# Altium PCB STM32FOC_AD_PCB.pcbdoc
Units mil, origin at the board's own origin, x right, y up, seen from the top; angles counter-clockwise.
Board outline 2805 x 2720 mil, 2 copper layers (Top Layer, Bottom Layer); 42 components, 35 nets, 188 pads, 52 vias.
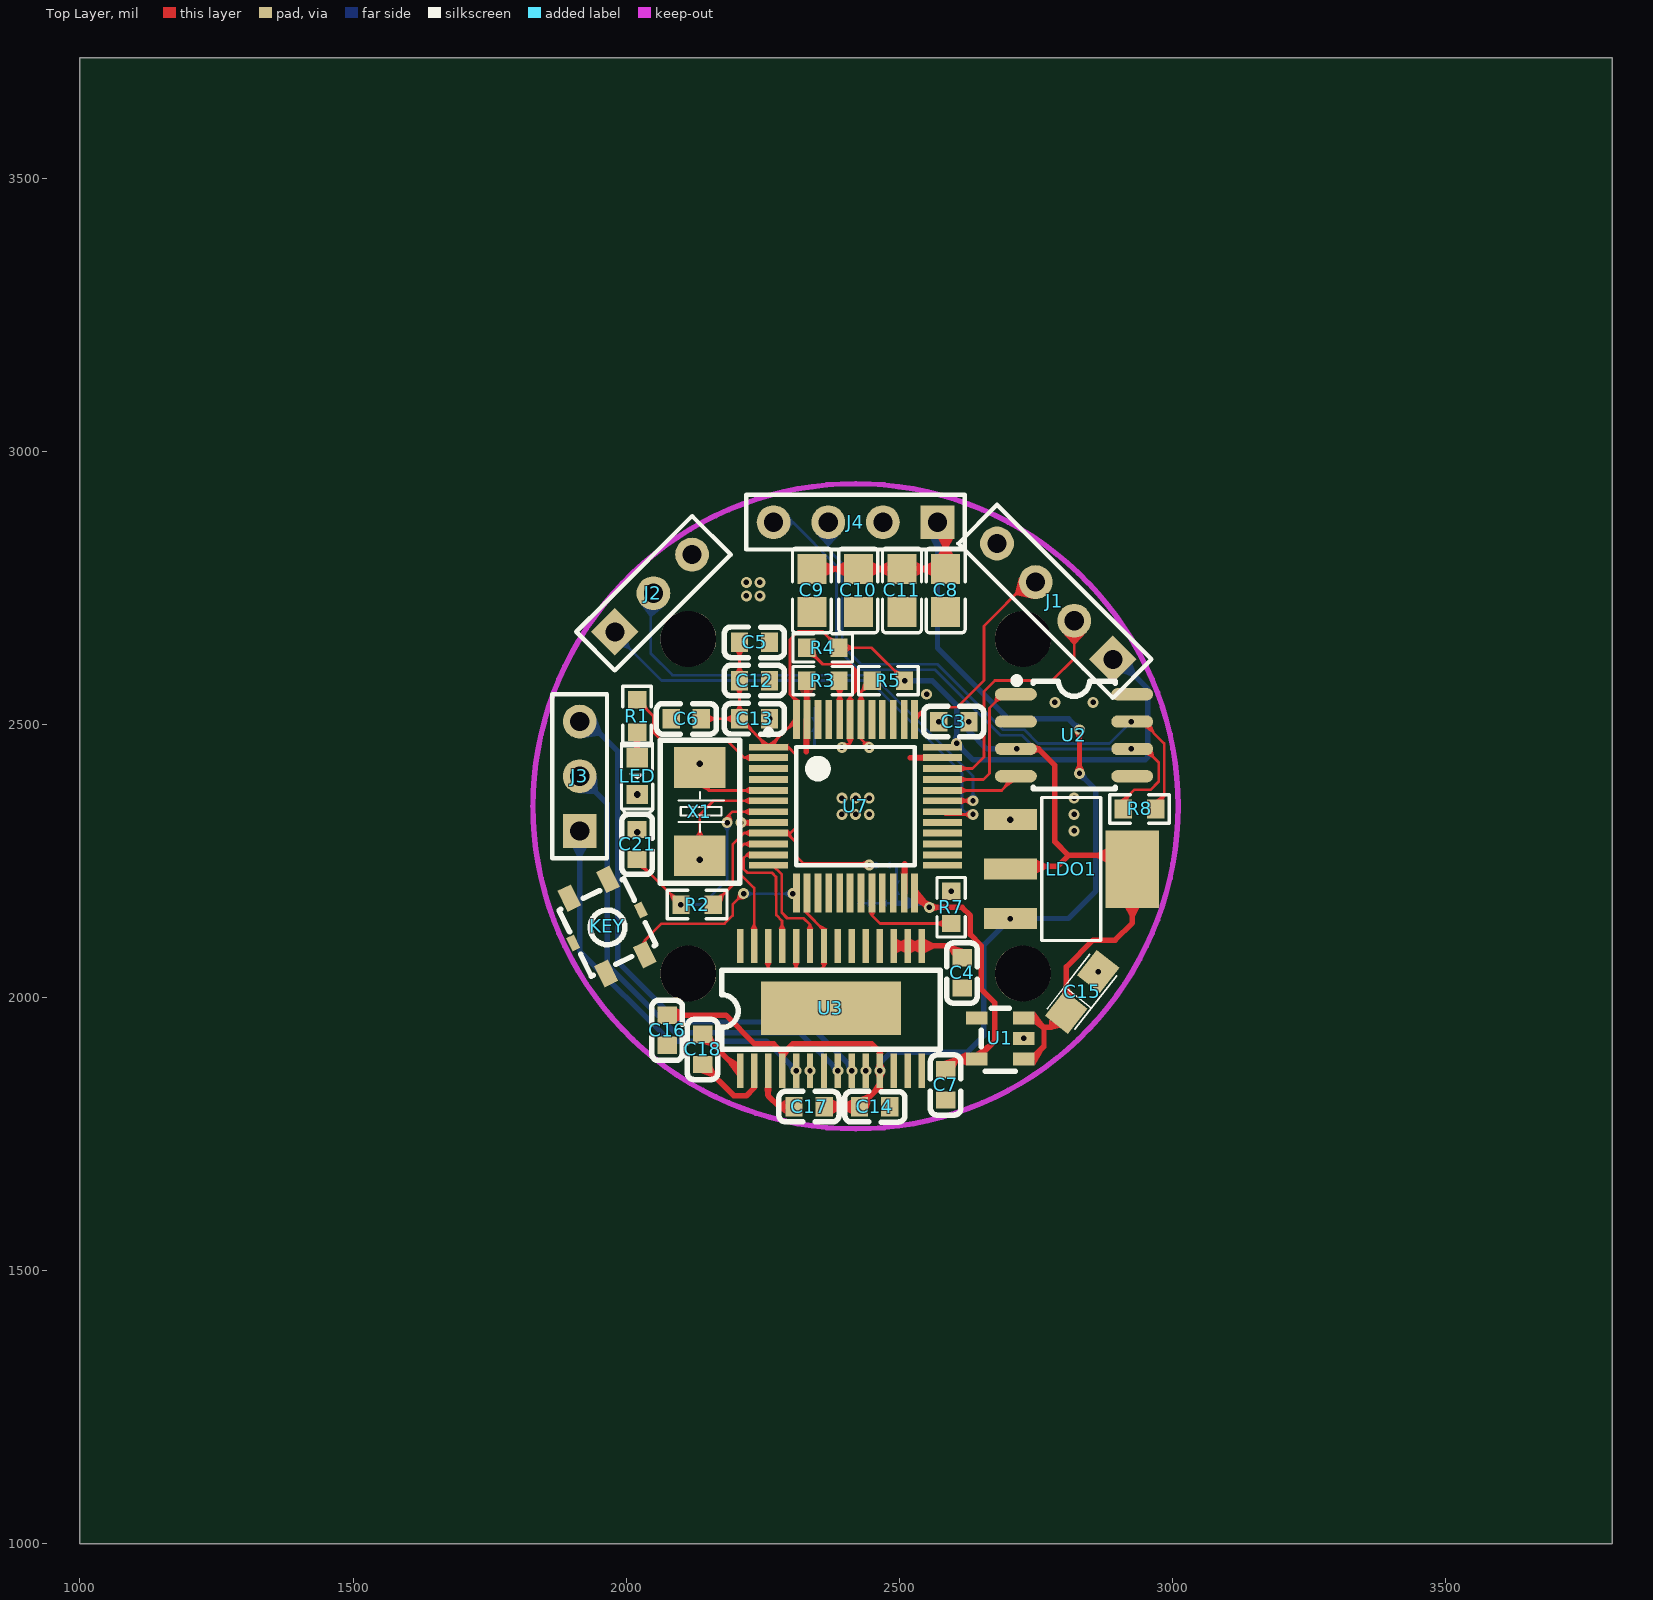
[diagram p0: Top Layer view]
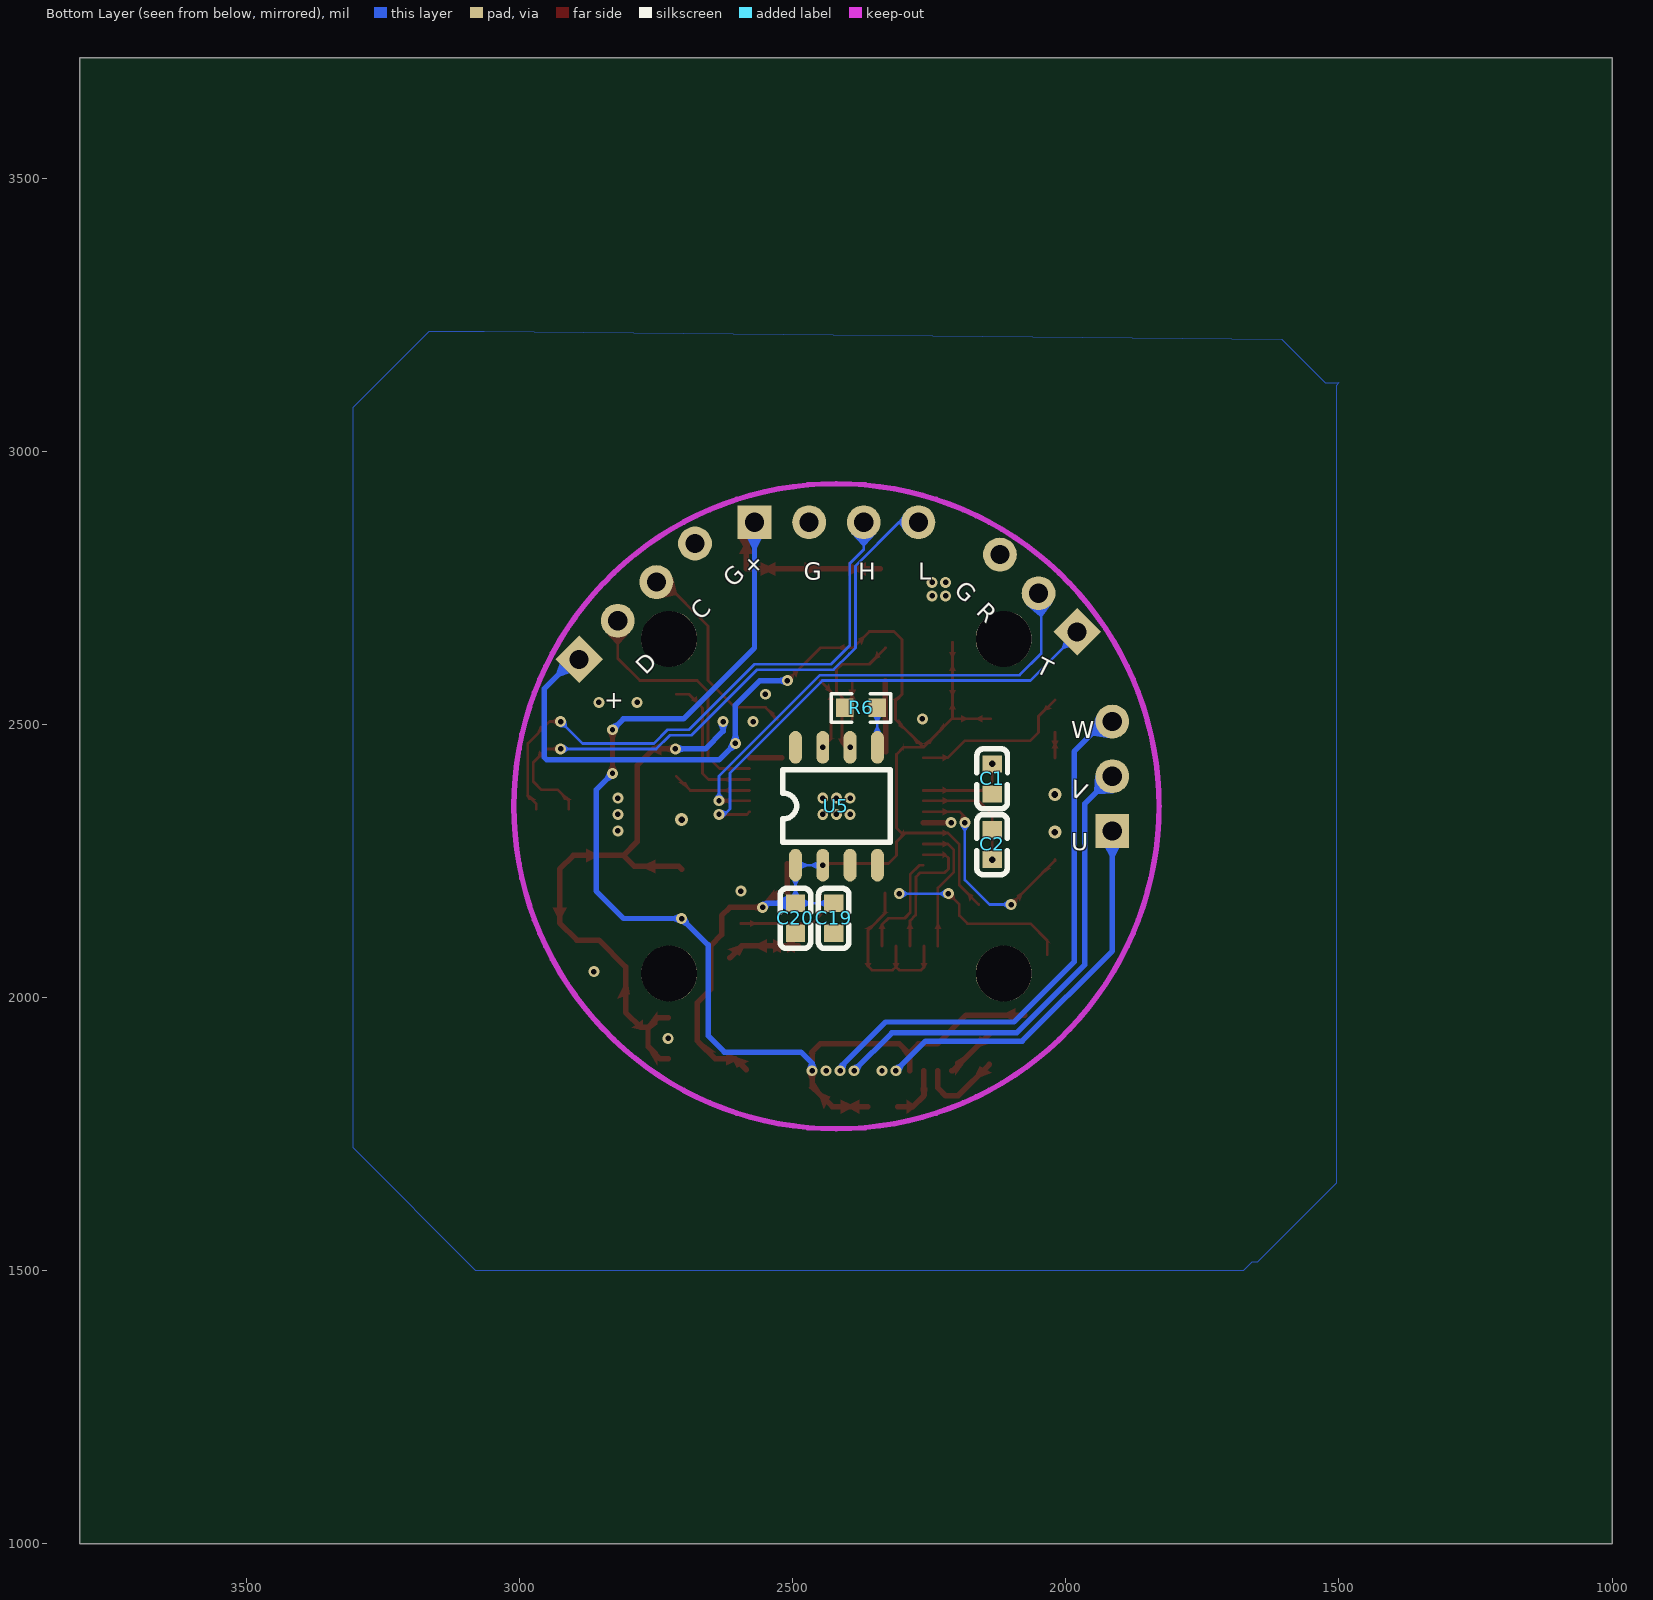
[diagram p1: Bottom Layer view, seen from below]

## Layer stack, top to bottom
Top Layer: signal copper (thickness not stored)
Dielectric: dielectric 12.6, FR-4, Dk 4.8
Bottom Layer: signal copper (thickness not stored)

## Board outline
3805,1000 1000,1000 1000,3720 3805,3720

## Components (designator, comment, footprint, x,y, rotation, side; value= is the part's Value field where it differs from the comment)
C1 "20pF" C0603#1 2135,2400 r90 bottom
C2 "20pF" C0603#1 2135,2280 r270 bottom
C3 "0.1uF" C0603#2 2600,2505 r0 top
C4 "0.47uF" C0603#2 2615,2045 r90 top
C5 "0.1uF" C0603#2 2235,2650 r0 top
C6 "0.1uF" C0603#2 2110,2510 r180 top
C7 "1uF" C0603#2 2585,1840 r90 top
C8 "22uF" C0805 2585,2745 r90 top
C9 "22uF" C0805 2340,2745 r90 top
C10 "22uF" C0805 2425,2745 r90 top
C11 "22uF" C0805 2505,2745 r90 top
C12 "0.1uF" C0603#2 2235,2580 r0 top
C13 "0.1uF" C0603#2 2235,2510 r0 top
C14 "0.1uF" C0603#2 2455,1800 r180 top
C15 "10uF" CASE-A_3216 2835,2010 r52 top
C16 "0.1uF" C0603#2 2075,1940 r90 top
C17 "0.1uF" C0603#2 2335,1800 r0 top
C18 "0.01uF" C0603#2 2140,1905 r90 top
C19 "0.1uF" C0603#1 2425,2145 r270 bottom
C20 "1uF" C0603#1 2495,2145 r270 bottom
C21 "0.1uF" C0603#2 2020,2280 r270 top
J1 "2.54-4P" HDR-M-2.54_1X4 2785,2725 r135 top
J2 "2.54-3P" HDR-M-2.54_1X3 2050,2740 r45 top
J3 "2.54-3P" HDR-M-2.54_1X3 1915,2405 r90 top
J4 "2.54-4P" HDR-M-2.54_1X4 2420,2870 r180 top
KEY "YTSA007A0152501B" SW-SMD_4P-L3.4-W3.4-P2.00-LS4.0_TS3315A160GF 1965,2130 r296 top
LDO1 "SPX1117-5V" SOT-223-4_L6.5-W3.5-P2.30-LS7.0-BR 2815,2235 r180 top
LED "LED-0603_R" LED0603_RED 2020,2405 r270 top
R1 "1k" R0603#1 2020,2515 r90 top
R2 "10k" R0603#1 2130,2170 r180 top
R3 "10k" R0603#1 2360,2580 r180 top
R4 "10k" R0603#1 2360,2640 r0 top
R5 "10k" R0603#1 2480,2580 r0 top
R6 "1k" R0603#2 2375,2530 r180 bottom
R7 "10k" R0603#1 2595,2165 r270 top
R8 "120R" R0603#1 2940,2345 r0 top
U1 "SPX3819-3.3" SOT-23-5_L2.9-W1.6-P0.95-LS2.8-BL 2685,1925 r90 top
U2 "TJA1050T" SOIC-8_L5.0-W4.0-P1.27-LS6.0-BL#1 2820,2480 r270 top
U3 "DRV8313PWPR" HTSSOP-28_L9.8-W4.5-P0.65-LS6.6-BL-EP 2375,1980 r0 top
U5 "AS5600-ASOM" SOIC-8_L5.0-W4.0-P1.27-LS6.0-BL#2 2420,2350 r0 bottom
U7 "STM32F103C8T6" STM-LQFP48 2420,2350 r0 top
X1 "8MHz" CRYSTAL-SMD_L5.0-W3.2 2135,2340 r90 top

## Footprints (in the part's own frame and the unit in brackets; to place one, negate y for a bottom-side part, rotate by r counter-clockwise, add the part's x,y. Pads: shape width x height; smd on the part's side, far side on the other; paste and mask are expansions set on the pad)
C0603#1 [mm]
  rect 0.8x0.9 smd paste+0 mask+0.051: 1(0.7,0) 2(-0.7,0)
  silkscreen extent -1.39,-0.72 1.41,0.71
C0603#2 [mm]
  rect 0.8x0.9 smd paste+0 mask+0.051: 1(-0.7,0) 2(0.7,0)
  silkscreen extent -1.41,-0.71 1.39,0.72
C0805 [mm]
  rect 1.41x1.35 smd paste-100 mask+0.051: 1(-1,0) 2(1,0)
  silkscreen extent -1.96,-0.9 1.96,0.9
CASE-A_3216 [mm]
  rect 1.5x1.359 smd paste+0 mask+0.051: 1(-1.2,0) 2(1.2,0)
  silkscreen extent -1.6,-0.8 1.6,0.8
CRYSTAL-SMD_L5.0-W3.2 [mm]
  rect 1.9x2.4 smd paste+0 mask+0.051: 1(-2.05,0) 2(2.05,0)
  silkscreen extent -3.32,-1.85 3.33,1.85
HDR-M-2.54_1X3 [mil]
  rect 62x62 hole 35 paste+0 mask+2: 1(-100,0)
  round 62 hole 35 paste+0 mask+2: 2(0,0) 3(100,0)
  silkscreen extent -150,-50 150,50
HDR-M-2.54_1X4 [mil]
  rect 62x62 hole 35 paste+0 mask+2: 1(-150,0)
  round 62 hole 35 paste+0 mask+2: 2(-50,0) 3(50,0) 4(150,0)
  silkscreen extent -200,-50 200,50
HTSSOP-28_L9.8-W4.5-P0.65-LS6.6-BL-EP [mm]
  rect 0.3x1.6 smd paste+0 mask+0.102: 1(-4.225,-2.9) 2(-3.575,-2.9) 3(-2.925,-2.9) 4(-2.275,-2.9) 5(-1.625,-2.9) 6(-0.975,-2.9) 7(-0.325,-2.9) 8(0.325,-2.9) 9(0.975,-2.9) 10(1.625,-2.9) 11(2.275,-2.9) 12(2.925,-2.9) 13(3.575,-2.9) 14(4.225,-2.9) 15(4.225,2.9) 16(3.575,2.9) 17(2.925,2.9) 18(2.275,2.9) 19(1.625,2.9) 20(0.975,2.9) 21(0.325,2.9) 22(-0.325,2.9) 23(-0.975,2.9) 24(-1.625,2.9) 25(-2.275,2.9) 26(-2.925,2.9) 27(-3.575,2.9) 28(-4.225,2.9)
  rect 6.5x2.5 smd paste+0 mask+0.102: 29(0,0)
  silkscreen extent -5.08,-1.91 5.08,1.78
LED0603_RED [mm]
  rect 0.9x1 smd paste+0 mask+0.051: 1(-0.85,0) 2(0.85,0)
  silkscreen extent -1.54,-0.73 1.75,0.73
R0603#1 [mil]
  rect 31.75x34.02 smd paste-3937.01 mask+2: 1(-29.66,0) 2(29.66,0)
  silkscreen extent -55,-26 55,26
R0603#2 [mil]
  rect 31.75x34.02 smd paste-3937.01 mask+2: 1(29.66,0) 2(-29.66,0)
  silkscreen extent -55,-26 55,26
SOIC-8_L5.0-W4.0-P1.27-LS6.0-BL#1 [mil]
  oval 22.38x76.78 smd paste+0 mask+2: 1(-75,-106.5) 2(-25,-106.5) 3(25,-106.5) 4(75,-106.5) 5(75,106.5) 6(25,106.5) 7(-25,106.5) 8(-75,106.5)
  silkscreen extent -106,-111 98,75
SOIC-8_L5.0-W4.0-P1.27-LS6.0-BL#2 [mil]
  oval 23.62x59.84 smd paste+0 mask+4: 1(75,107.87) 2(25,107.87) 3(-25,107.87) 4(-75,107.87) 5(-75,-107.87) 6(-25,-107.87) 7(25,-107.87) 8(75,-107.87)
  silkscreen extent -98,-67 98,66
SOT-23-5_L2.9-W1.6-P0.95-LS2.8-BL [mm]
  rect 0.6x1 smd paste+0 mask+0.05: 1(-0.95,-1.1) 2(0,-1.1) 3(0.95,-1.1) 4(0.95,1.1) 5(-0.95,1.1)
  silkscreen extent -1.52,-0.7 1.4,0.89
SOT-223-4_L6.5-W3.5-P2.30-LS7.0-BR [mm]
  rect 2.47x0.98 smd paste+0 mask+0.051: 1(2.835,-2.3) 2(2.835,0) 3(2.835,2.3)
  rect 2.47x3.6 smd paste+0 mask+0.051: 4(-2.835,0)
  silkscreen extent -1.37,-3.33 1.37,3.33
STM-LQFP48 [mil]
  rect 71.5x12.5 smd paste+0 mask+2: 1(-159,108) 2(-159,89) 3(-159,69) 4(-159,49) 5(-159,29) 6(-159,10) 7(-159,-10) 8(-159,-30) 9(-159,-49) 10(-159,-69) 11(-159,-89) 12(-159,-108) 25(159,-108) 26(159,-89) 27(159,-69) 28(159,-49) 29(159,-30) 30(159,-10) 31(159,10) 32(159,29) 33(159,49) 34(159,69) 35(159,89) 36(159,108)
  rect 12.5x71.5 smd paste+0 mask+2: 13(-108,-159) 14(-89,-159) 15(-69,-159) 16(-49,-159) 17(-29,-159) 18(-10,-159) 19(10,-159) 20(30,-159) 21(49,-159) 22(69,-159) 23(89,-159) 24(108,-159) 37(108,159) 38(89,159) 39(69,159) 40(49,159) 41(30,159) 42(10,159) 43(-10,159) 44(-29,159) 45(-49,159) 46(-69,159) 47(-89,159) 48(-108,159)
  silkscreen extent -164,-108 108,141
SW-SMD_4P-L3.4-W3.4-P2.00-LS4.0_TS3315A160GF [mm]
  rect 1.1x0.7 smd paste+0 mask+0.051: 1(-1.95,1) 2(1.95,1) 3(-1.95,-1) 4(1.95,-1)
  rect 0.7x0.4 smd paste+0 mask+0.051: 5(0,1.755) 5(0,-1.755)
  silkscreen extent -1.65,-1.67 1.76,1.68

## Free pads (board coordinates)
  round 102.36 hole 102.36 unplated paste+0: ""(2113.78,2043.78) ""(2113.78,2656.22) ""(2726.22,2043.78) ""(2726.22,2656.22)

## Via types
v1: diameter 20, hole 10, Top Layer to Bottom Layer, tented both sides, 47 vias
v2: diameter 24, hole 12, Top Layer to Bottom Layer, tented both sides, 5 vias

## Nets (pads, with @x,y where several pads share a name; then routed paths per layer and width w, separated by ;. In a path a pad name is that pad's centre, name@x,y a point inside that pad or via, vN(x,y) a via of type N, cw(c..) or ccw(c..) an arc to the next point about the centre after c; other vN are vias at no path point)
+3.3V: C5.1 C6.1 C7.2 C12.1 C13.1 C19.2 C20.2 J1.1 R2.1 R4.2 R5.2 U1.5 U5.1 U5.2 U7.1 U7.9 U7.24 U7.36 U7.48 | length 2931.4
  Top Layer w5: C6.1 C13.1 ; R2.1 2195,2205.3 2195,2280 2216,2301 U7.9 ; C5.1 C12.1 C13.1 ; v1(2445,2242.13) 2442.1,2245 2325,2245 2310,2260 2310,2285 2294,2301 U7.9 ; v1(2509.66,2580) 2449.7,2640 R4.2 2359.7,2670 2315,2670 2300,2655 2300,2555 2312,2543 U7.48 U7.1 ; C13.1 2209,2510 U7.1 ; U7.9 2299,2301 2300,2300 2310,2310 2310,2445 2297,2458 U7.1
  Top Layer w10: U7.24@2528,2182 U7.24 v1(2555,2165) 2615,2165 2630,2150 2630,2115 2650,2095 2650,2015 2675,1990 2675,1920.9 U1.5 2605,1887.6 C7.2
  Bottom Layer w5: C19.2 C20.2 U5.1 v1(2445,2242.13)
  Bottom Layer w10: C20.2 2547.4,2172.6 v1(2555,2165) ; v1(2509.66,2580) 2560,2580 2605,2535 2605,2515 ; 2605,2520 v1(2605,2465) 2635,2435 2950,2435 2955,2440 2955,2565 2901.1,2618.9 J1.1
+5V: C3.2 C15.1 LDO1.2 LDO1.4 U1.1 U1.3 U2.3 | length 1133.1
  Top Layer w10: LDO1.2 2708.4,2240 2790,2240 2810,2260 ; v1(2715,2455) 2755,2455 2785,2425 2785,2285 2810,2260 ; U1.1 2742.6,1887.6 2765,1910 2765,1945 ; U1.3 2747.6,1962.4 2765,1945 ; 2765,1945 2778.1,1945 C15.1 2805.9,2055.9 2855,2105 2895,2105 2926.6,2136.6 LDO1.4 2901.6,2260 2810,2260
  Bottom Layer w10: v1(2627.56,2505) 2627.56,2487.44 2660,2455 v1(2715,2455)
BOOT0: R3.1 U7.44 | length 71.5
  Top Layer w5: R3.1 2391,2578.7 U7.44
BOOT1: R7.2 U7.20 | length 192.1
  Top Layer w5: U7.20 2450,2150 2464.7,2135.3 R7.2
CAN_RX: U2.4 U7.32 | length 145.3
  Top Layer w5: U7.32 2687.5,2379 U2.4
CAN_TX: U2.1 U7.33 | length 269.4
  Top Layer w5: U7.33 2654,2399 2665,2410 2665,2530 2690,2555 U2.1
CANH: J4.3 R8.2 U2.7 | length 1057.9
  Top Layer w5: U2.7 2945,2505 2985,2465 2985,2370 2969.7,2354.7 R8.2
  Bottom Layer w5: J4.3 2370,2820 2395.6,2794.4 2395.6,2644.4 2430,2610 2570,2610 2690,2490 2729.2,2490 2754.2,2465 2885,2465 v1(2925,2505)
CANL: J4.4 R8.1 U2.6 | length 1103
  Top Layer w5: R8.1 2910.3,2360.3 2930,2380 2960,2380 2975,2395 2975,2430 2950,2455 U2.6
  Bottom Layer w5: J4.4 2305,2870 2385,2790 2385,2640 2396.4,2628.6 2425,2600 2565,2600 2685,2480 2725,2480 2750,2455 v1(2925,2455)
DRV_EN: U3.22 U3.24 U3.26 U7.14 | length 337.3
  Top Layer w5: U3.26 2259.8,2055.2 2265,2050 2305,2050 2311,2056 ; U3.24 2311,2056 ; U7.14 2331,2156 2330,2155 2362.2,2122.8 U3.22 2362.2,2057.2 2355,2050 2317,2050 2311,2056
GND: C1.2 C2.2 C3.1 C4.1 C5.2 C6.2 C7.1 C8.1 C9.1 C10.1 C11.1 C12.2 C13.2 C14.1 C15.2 C16.1 C19.1 C20.1 C21.1 J1.4 J2.3 J4.2 KEY.3 LDO1.1 LED.2 R3.2 R6.2 R7.1 U1.2 U2.2 U2.8 U3.6 U3.7 U3.10 U3.12 U3.13 U3.14 U3.19 U3.20 U3.21 U3.28 U3.29 U5.4 U5.8 U7.8 U7.23 U7.35 U7.47 | length 294.8
  Top Layer w10: v1(2210,2320) U7.8 ; 2330,2450 2330,2508 U7.47 R3.2 ; U7.23 2510,2192 2510,2245 ; 2520,2439 U7.35
  other v1: 2336.61,1865.83 2438.98,1865.83 2728.31,1925 2864.08,2047.23 2595,2194.66 2820,2305 2395,2335 2420,2335 2445,2335 2820,2335 2395,2365 2420,2365 2445,2365 2820,2365 2572.44,2505 2262.56,2510 2785,2540 2855,2540 2550,2555 2220,2735 2245,2735 2220,2760 2245,2760
  other v2: 2020,2302.56 2703.39,2325.55 2020,2371.54
KEY: KEY.2 U7.13 | length 344
  Top Layer w5: KEY.2 2034,2104 2065,2135 2180,2135 2195,2150 2195,2170 v1(2215,2190)
  Bottom Layer w5: v1(2215,2190) v1(2305,2190)
LED: R1.2 U7.2 | length 302.2
  Top Layer w5: R1.2 2050,2514.7 2050,2485 2065,2470 2185,2470 2216,2439 U7.2
LED_1: LED.1 R1.1 | length 46.8
  Top Layer w5: LED.1 R1.1
OSC_IN: C1.1 U7.5 X1.2 | length 158.3
  Top Layer w5: X1.2 2135,2395 2151,2379 U7.5
  other v2: 2135,2427.56
OSC_OUT: C2.1 U7.6 X1.1 | length 212.1
  Top Layer w5: X1.1 2135,2335 2160,2360 U7.6
  other v2: 2135,2252.44
PWM1: U3.27 U7.10 | length 273.6
  Top Layer w5: U3.27@2234.3,2119.3 2234.3,2094.2 2234.3,2200.7 2205,2230 2205,2270 2216,2281 U7.10
PWM2: U3.25 U7.11 | length 264.5
  Top Layer w5: U7.11 2221,2261 2215,2255 2215,2235 2221.8,2228.2 2266.8,2228.2 2274.2,2220.8 2275,2150.8 2285.4,2140.3 U3.25
PWM3: U3.23 U7.12 | length 200.8
  Top Layer w5: U7.12 2268,2242 2285,2225 2285,2155 2295,2145 2325,2145 2336.6,2133.4 U3.23
RST: C21.2 R2.2 U7.7 | length 414.1
  Top Layer w5: C21.2 2020,2250.3 v1(2100.34,2170) ; v1(2185,2320) 2185,2330 2195,2340 U7.7
  Bottom Layer w5: v1(2100.34,2170) 2140,2170 2185,2215 v1(2185,2320)
S$1126: 
SCL: R5.1 U5.7 U7.42 | length 136.7
  Top Layer w5: v1(2445,2457.87) 2430,2472.9 U7.42 2430,2559.7 R5.1
SDA: R4.1 U5.6 U7.43 | length 263.4
  Top Layer w5: R4.1 2360,2610 2410,2610 2420,2600 2420,2560 2410,2550 U7.43 2410,2465 2402.9,2457.9 v1(2395,2457.87)
SWCLK: J1.3 U7.37 | length 384.3
  Top Layer w5: U7.37 2550,2531 2606,2531 2655,2580 2655,2680 2735.3,2760.3 J1.3@2749.6,2760.3
SWDIO: J1.2 U7.34 | length 464.3
  Top Layer w5: U7.34 2634,2419 2655,2440 2655,2560 2675,2580 2780,2580 2820.4,2620.4 J1.2
U: J3.1 U3.5 | length 706.8
  Bottom Layer w10: J3.1 1915,2085 2080,1920 2256.8,1920 v1(2311.02,1865.83)
U1RX: J2.2 U7.31 | length 899.2
  Top Layer w5: U7.31 v1(2635,2360)
  Bottom Layer w5: J2.2 2045,2740 2045,2630 2085,2590 2450,2590 2635,2405 v1(2635,2360)
U1TX: J2.1 U7.30 | length 892.9
  Top Layer w5: U7.30 2584,2335 v1(2635,2335)
  Bottom Layer w5: J2.1 1979.3,2665.7 2065,2580 2445.8,2580 2615,2410.8 2615,2345 2625,2335 v1(2635,2335)
U3_1: C18.2 U3.1 | length 96.4
  Top Layer w10: C18.2 2206.7,1865.8 U3.1
U3_2: C18.1 U3.2 | length 155.5
  Top Layer w10: C18.1 2197.4,1820 2220,1820 2234.3,1834.3 U3.2@2234.3,1865.8
U3_3: C17.1 U3.3 | length 101.5
  Top Layer w10: U3.3 2260,1820 2280,1800 C17.1
U3_15: C4.2 U3.15 U3.16 U3.17 | length 133.7
  Top Layer w10: U3.17 2515.7,2094.2 U3.15 2593.4,2094.2 C4.2
U5_5: R6.1 U5.5 | length 72.1
  Bottom Layer w5: U5.5 R6.1
V: J3.2 U3.8 | length 868.9
  Bottom Layer w10: J3.2 1965,2355 1965,2060 2090,1935 2318.6,1935 v1(2387.79,1865.83)
VCC: C8.2 C9.2 C10.2 C11.2 C14.2 C16.2 C17.2 J4.1 LDO1.3 U3.4 U3.11 | length 2509.4
  Top Layer w10: C16.2 2182.4,1967.6 2235,1915 2270,1915 2285.4,1899.6 U3.4 2285.4,1895.4 2305,1915 2450,1915 2464.6,1900.4 v1(2464.57,1865.83) 2464.6,1837.1 C14.2 C17.2 ; C9.2 C10.2 C11.2 C8.2 2585,2855 J4.1 ; v1(2830,2410) v1(2830,2490)
  Bottom Layer w10: v1(2464.57,1865.83) 2464.57,1879.57 2485,1900 2625,1900 2655,1930 2655,2096.06 v1(2703.39,2144.45) ; J4.1 2570,2640 2700,2510 2810,2510 v1(2830,2490) ; v1@2703.4,2144.5 2809.5,2144.5 2860,2195 2860,2380 v1(2830,2410)
W: J3.3 U3.9 | length 992.1
  Bottom Layer w10: J3.3 1930,2505 1985,2450 1985,2065 2095,1955 2330,1955 2413.4,1871.6 v1(2413.39,1865.83)
pads on no net: KEY.1 KEY.4 KEY.5 U1.4 U2.5 U3.18 U5.3 U7.3 U7.4 U7.15 U7.16 U7.17 U7.18 U7.19 U7.21 U7.22 U7.25 U7.26 U7.27 U7.28 U7.29 U7.38 U7.39 U7.40 U7.41 U7.45 U7.46

## Polygon pours and split planes (outlines as drawn)
GND on Top Layer (solid): 1665,3150 1580,3065 1580,1680 1695,1565 3065,1565 3190,1690 3190,1705 3210,1725 3210,3065 3110,3165 3070,3165 3050,3145 1665,3145 1670,3150
GND on Bottom Layer (solid): 1605,3205 1525,3125 1500,3125 1505,3120 1505,1660 1650,1515 1660,1515 1675,1500 3080,1500 3305,1725 3305,3080 3165,3220 3065,3220

## Keep-outs
Keep-Out Layer:
  circle w10: c2420,2350 r590.55

## Other copper
Top Layer:
  region net CANL: 2964.21,2451.17 2954.11,2443.82 2961.52,2439.94 2965.62,2442.92
  region net CANH: 2961.91,2497.4 2949.94,2493.81 2960.15,2486.31 2967.22,2486.31
  region net CAN_RX: 2708.56,2393.81 2696.06,2393.81 2691.28,2386.31 2698.35,2386.31
  region net +5V: 2740.7,2443.81 2740.7,2466.19 2755,2460 2755,2450
  region net CAN_TX: 2685.89,2543.82 2675.79,2551.17 2674.38,2542.92 2678.48,2539.94
  region net KEY: 2028.38,2099.59 2036.94,2103.76 2036.5,2104 2031.5,2102.78
  region net RST: 2037.72,2236.69 2027.36,2236.69 2037.57,2229.19 2044.64,2229.19
  region net BOOT1: 2577.99,2129.05 2577.99,2141.55 2570.49,2137.8 2570.49,2132.8
  region net BOOT0: 2384.75,2562.99 2397.25,2562.99 2393.5,2555.49 2388.5,2555.49
  region net U3_2: 2157.72,1873.86 2135.88,1861.69 2155.1,1855.23 2164.18,1860.29
  region net U3_1: 2157.72,1929.16 2135.98,1916.81 2155.09,1910.41 2164.11,1915.53
  region net U3_3: 2291.69,1787.5 2291.69,1812.5 2280,1805 2280,1795
  region net VCC: 2378.31,1812.5 2378.31,1787.5 2393.31,1795 2393.31,1805
  region net VCC: 2092.72,1980.1 2092.72,1955.1 2107.72,1962.6 2107.72,1972.6
  region net VCC: 2430.89,1817.72 2443.19,1795.95 2449.61,1815.08 2444.5,1824.12
  region net VCC: 2411.69,1787.5 2411.69,1812.5 2396.69,1805 2396.69,1795
  region net U3_15: 2597.28,2076.14 2619.12,2088.31 2599.9,2094.77 2590.82,2089.71
  region net +3.3V: 2191.69,2503.75 2191.69,2516.25 2184.19,2512.5 2184.19,2507.5
  region net +3.3V: 2223.19,2502.06 2223.19,2492.28 2230.69,2484.78 2230.69,2491.85
  region net +3.3V: 2201.15,2527.72 2213.65,2527.72 2209.9,2535.22 2204.9,2535.22
  region net +3.3V: 2213.65,2562.28 2201.15,2562.28 2204.9,2554.78 2209.9,2554.78
  region net +3.3V: 2201.15,2597.72 2213.65,2597.72 2209.9,2605.22 2204.9,2605.22
  region net +3.3V: 2153.31,2516.25 2153.31,2503.75 2160.81,2507.5 2160.81,2512.5
  region net +3.3V: 2213.65,2632.28 2201.15,2632.28 2204.9,2624.78 2209.9,2624.78
  region net OSC_OUT: 2128.75,2296.69 2141.25,2296.69 2137.5,2304.19 2132.5,2304.19
  region net OSC_IN: 2152.94,2383.31 2140.44,2383.31 2147.47,2379 2152.77,2380.77
  region net +3.3V: 2248.5,2464.25 2261,2464.25 2250.79,2471.75 2243.71,2471.75
  region net +3.3V: 2261,2464.25 2273.5,2464.25 2278.29,2471.75 2271.22,2471.75
  region net +3.3V: 2296.75,2464.25 2296.75,2451.75 2297,2455.5 2297,2460.5
  region net LED: 2225.25,2432.75 2225.25,2445.25 2217.75,2441.5 2217.75,2436.5
  region net OSC_IN: 2225.25,2372.75 2225.25,2385.25 2217.75,2381.5 2217.75,2376.5
  region net OSC_OUT: 2225.25,2353.75 2225.25,2366.25 2217.75,2362.5 2217.75,2357.5
  region net RST: 2225.25,2333.75 2225.25,2346.25 2217.75,2342.5 2217.75,2337.5
  region net +3.3V: 2225.25,2294.75 2225.25,2307.25 2217.75,2303.5 2217.75,2298.5
  region net +3.3V: 2296.75,2307.25 2296.75,2294.75 2299,2298.5 2299,2303.5
  region net +3.3V: 2296.75,2307.25 2296.68,2294.75 2304.15,2287.32 2304.18,2294.35
  region net PWM1: 2225.25,2274.75 2225.25,2287.25 2217.75,2283.5 2217.75,2278.5
  region net PWM2: 2225.25,2254.75 2225.25,2267.25 2221,2263.5 2221,2258.5
  region net DRV_EN: 2336.5,2155.25 2331.77,2153.23 2329.75,2155.25 2324.75,2155.25 2328.23,2156.77 2329.75,2155.25 2336.5,2155.25
  region net BOOT1: 2456.25,2155.25 2443.75,2155.25 2447.5,2150 2452.5,2150
  region net +3.3V: 2534.25,2197.48 2534.25,2172.48 2549.25,2163.6 2549.25,2177.48
  region net U1RX: 2614.75,2366.25 2614.75,2353.75 2622.25,2357.5 2622.25,2362.5
  region net CAN_RX: 2614.75,2385.25 2614.75,2372.75 2622.25,2376.5 2622.25,2381.5
  region net CAN_TX: 2614.75,2405.25 2614.75,2392.75 2622.25,2396.5 2622.25,2401.5
  region net SWDIO: 2614.75,2425.25 2614.75,2412.75 2622.25,2416.5 2622.25,2421.5
  region net SWCLK: 2534.25,2521.5 2534.25,2509 2541.75,2519.21 2541.75,2526.29
  region net SCL: 2423.75,2544.75 2436.25,2544.75 2432.5,2552.25 2427.5,2552.25
  region net SCL: 2436.25,2473.25 2423.75,2473.25 2427.5,2472.9 2432.5,2472.9
  region net SDA: 2403.75,2544.75 2416.25,2544.75 2412.5,2550 2407.5,2550
  region net SDA: 2416.25,2473.25 2403.75,2473.25 2407.5,2465.75 2412.5,2465.75
  region net BOOT0: 2384.75,2544.75 2397.25,2544.75 2393.5,2552.25 2388.5,2552.25
  region net +3.3V: 2305.75,2544.75 2316.5,2544.75 2306.28,2552.25 2299.21,2552.25
  region net +3.3V: 2305.75,2496.5 2305.75,2509 2298.25,2498.78 2298.25,2491.71
  region net U3_1: 2202.75,1857.25 2202.75,1882.25 2187.75,1891.85 2187.75,1877.7
  region net U3_2: 2240.16,1834.33 2228.35,1834.33 2229.3,1834.3 2239.3,1834.3
  region net U3_3: 2265.75,1834.33 2253.94,1834.33 2255,1820 2265,1820.02
  region net VCC: 2279.53,1897.32 2291.34,1897.32 2290.4,1899.6 2280.4,1899.6
  region net VCC: 2279.53,1897.32 2291.34,1890.68 2300.05,1902.98 2291.01,1908.08
  region net VCC: 2458.66,1897.32 2470.47,1897.32 2469.6,1900.4 2459.6,1900.4
  region net VCC: 2470.47,1834.33 2458.66,1843.24 2450.79,1830.39 2458.85,1824.31
  region net U3_15: 2547.24,2106.7 2547.24,2081.7 2562.24,2089.2 2562.24,2099.2
  region net U3_15: 2535.43,2081.7 2535.43,2106.7 2520.43,2099.2 2520.43,2089.2
  region net U3_15: 2521.65,2106.7 2521.65,2081.7 2536.65,2089.2 2536.65,2099.2
  region net U3_15: 2509.84,2081.7 2509.84,2106.7 2494.84,2099.2 2494.84,2089.2
  region net U3_15: 2496.06,2106.7 2496.06,2081.7 2511.06,2089.2 2511.06,2099.2
  region net DRV_EN: 2368.11,2062.68 2356.3,2062.68 2359.7,2057.2 2364.7,2057.2
  region net DRV_EN: 2356.3,2124.71 2368.11,2125.67 2356.3,2132.24 2349.76,2131.71
  region net PWM3: 2330.71,2125.67 2342.52,2125.67 2339.1,2133.17 2334.1,2133.17
  region net DRV_EN: 2316.93,2062.68 2305.12,2062.68 2308.5,2056 2313.5,2056
  region net PWM2: 2279.53,2125.67 2291.34,2125.67 2287.9,2133.17 2282.9,2133.17
  region net DRV_EN: 2265.75,2062.68 2253.94,2062.68 2257.3,2055.2 2262.3,2055.2
  region net PWM1: 2228.35,2125.67 2240.16,2125.67 2236.8,2133.17 2231.8,2133.17
  region net +5V: 2748,1974.21 2748,1950.59 2763,1939.93 2763,1954.07
  region net +5V: 2746.79,1899.41 2748,1875.79 2761.79,1899.72 2761.1,1913.17
  region net +3.3V: 2641.01,1899.41 2661.38,1899.41 2675.58,1914.41 2661.44,1914.41
  region net +3.3V: 2622.01,1875.79 2622.01,1899.41 2607.01,1892.6 2607.01,1882.6
  region net CANL: 2918.26,2362.01 2905.76,2362.01 2915.97,2369.51 2923.04,2369.51
  region net CANH: 2970.76,2362.01 2983.26,2362.01 2988.04,2369.51 2980.97,2369.51
  region net SCL: 2440.07,2562.99 2434.47,2574.17 2431.04,2564.27 2433.4,2559.56
  region net +3.3V: 2493.78,2585.96 2499.63,2597.01 2492.91,2600.33 2490.46,2595.71
  region net SDA: 2346.22,2633.8 2339.95,2622.99 2346.77,2619.81 2349.37,2624.29
  region net +3.3V: 2405.53,2646.25 2405.53,2633.75 2413.03,2637.5 2413.03,2642.5
  region net +3.3V: 2373.78,2645.96 2379.63,2657.01 2372.91,2660.33 2370.46,2655.71
  region net LED_1: 2013.75,2469.47 2026.25,2469.47 2022.5,2461.97 2017.5,2461.97
  region net LED: 2037.01,2534.62 2025.96,2528.78 2035.71,2525.45 2040.34,2527.9
  region net LED_1: 2013.75,2456.18 2026.25,2456.18 2022.5,2463.68 2017.5,2463.68
  region net +5V: 2939.1,2164.13 2914.1,2164.13 2921.6,2149.13 2931.6,2149.13
  region net +5V: 2877.99,2247.5 2877.99,2272.5 2862.99,2265 2862.99,2255
  region net +5V: 2752.01,2227.5 2752.01,2252.5 2767.01,2245 2767.01,2235
  region net +5V: 2798.02,2006.12 2821.65,1997.95 2810.9,2017.54 2800.9,2021
  region net +5V: 2794.7,1944.06 2775,1959.45 2774.57,1948.54 2782.07,1941.9
  region net +3.3V: 2580.88,1883.31 2602.72,1871.14 2609.18,1884.71 2600.1,1889.77
  region net VCC: 2478.43,2771.9 2478.43,2796.9 2463.43,2789.4 2463.43,2779.4
  region net VCC: 2531.57,2796.9 2531.57,2771.9 2546.57,2779.4 2546.57,2789.4
  region net VCC: 2398.43,2771.9 2398.43,2796.9 2383.43,2789.4 2383.43,2779.4
  region net VCC: 2451.57,2796.9 2451.57,2771.9 2466.57,2779.4 2466.57,2789.4
  region net VCC: 2366.57,2796.9 2366.57,2771.9 2381.57,2779.4 2381.57,2789.4
  region net VCC: 2558.43,2771.9 2558.43,2796.9 2543.43,2789.4 2543.43,2779.4
  region net VCC: 2572.5,2812.13 2597.5,2812.13 2590,2827.13 2580,2827.13
  region net +3.3V: 2169.93,2187.01 2175.53,2175.83 2178.96,2185.73 2176.6,2190.44
  region net RST: 2084.47,2175.83 2090.07,2187.01 2083.4,2190.44 2081.04,2185.73
  region net VCC: 2597.5,2839 2572.5,2839 2580,2824 2590,2824
  region net VCC: 2472.08,1872.43 2457.08,1872.46 2459.6,1879.46 2469.6,1879.43
  region net VCC: 2472.08,1859.23 2457.08,1859.2 2459.6,1852.2 2469.6,1852.23
  region net OSC_IN: 2126,2419.62 2144,2419.62 2137.5,2411.22 2132.5,2411.22
  region net OSC_OUT: 2126,2260.38 2144,2260.38 2137.5,2268.78 2132.5,2268.78
  region net +3.3V: 2561.61,2157.5 2561.61,2172.5 2568.61,2170 2568.61,2160
  region net +3.3V: 2555.44,2174.99 2545.03,2164.19 2541.73,2170.84 2548.66,2178.05
  region net U1TX: 2628.39,2327.5 2628.39,2342.5 2621.39,2337.5 2621.39,2332.5
  region net U1RX: 2628.39,2352.5 2628.39,2367.5 2621.39,2362.5 2621.39,2357.5
  region net VCC: 2822.5,2483.39 2837.5,2483.39 2835,2476.39 2825,2476.39
  region net VCC: 2822.5,2416.61 2837.5,2416.61 2835,2423.61 2825,2423.61
  region net CANH: 2931.61,2497.5 2931.61,2512.5 2938.61,2507.5 2938.61,2502.5
  region net CANL: 2931.61,2447.5 2931.61,2462.5 2938.61,2457.5 2938.61,2452.5
  region net +3.3V: 2510.31,2589.98 2499.68,2579.39 2498.28,2587.88 2501.82,2591.41
  region net KEY: 2215.63,2180.02 2205.02,2190.63 2203.61,2182.14 2207.14,2178.61
  region net RST: 2193.85,2324.65 2179.28,2328.2 2185.38,2333.92 2191.07,2332.53
  region net RST: 2100.95,2179.98 2090.36,2169.35 2088.93,2177.84 2092.46,2181.38
  region net +3.3V: 2440.12,2250.86 2436.95,2236.19 2431.15,2242.5 2432.23,2247.5
  region net SDA: 2403.85,2453.22 2398.51,2467.24 2406.75,2465.28 2408.7,2460.16
  region net SCL: 2445.64,2467.85 2435.02,2457.26 2433.62,2465.75 2437.16,2469.28
  region net +5V: 2721.61,2447.5 2721.61,2462.5 2728.61,2460 2728.61,2450
  region net SWCLK: 2744.12,2729.85 2720.08,2769.65 2712.19,2740.73 2714.86,2736.32
  region net SWDIO: 2843.63,2669.16 2797.13,2669.11 2817.9,2647.43 2822.9,2647.44
Bottom Layer:
  region net +3.3V: 2483.19,2235.85 2483.19,2248.35 2475.69,2244.6 2475.69,2239.6
  region net +3.3V: 2501.25,2214 2488.75,2214 2492.5,2206.5 2497.5,2206.5
  region net +3.3V: 2456.81,2248.35 2456.81,2235.85 2464.31,2239.6 2464.31,2244.6
  region net U5_5: 2351.33,2485.95 2338.84,2486.05 2342.65,2493.52 2347.65,2493.48
  region net U1TX: 2003.84,2650 1995,2641.16 2002.96,2638.51 2006.49,2642.04
  region net +3.3V: 2926.82,2610.85 2909.15,2593.18 2925.06,2587.87 2932.13,2594.94
  region net VCC: 2582.5,2839 2557.5,2839 2565,2824 2575,2824
  region net U: 1927.5,2274 1902.5,2274 1910,2259 1920,2259
  region net +3.3V: 2477.28,2178.85 2477.28,2166.35 2469.78,2170.1 2469.78,2175.1
  region net +3.3V: 2501.25,2188.31 2488.75,2188.31 2492.5,2195.81 2497.5,2195.81
  region net +3.3V: 2512.72,2160.1 2512.72,2185.1 2527.72,2177.6 2527.72,2167.6
  region net +3.3V: 2442.72,2166.35 2442.72,2178.85 2450.22,2175.1 2450.22,2170.1
  region net U5_5: 2351.48,2512.99 2338.98,2512.99 2342.7,2505.49 2347.7,2505.49
  region net VCC: 2457.07,1872.44 2472.07,1872.44 2469.57,1879.44 2459.57,1879.44
  region net VCC: 2704.02,2134.47 2693.41,2145.08 2690.23,2138.36 2697.3,2131.29
  region net VCC: 2710.03,2136.97 2709.98,2151.97 2716.99,2149.5 2717.02,2139.5
  region net +3.3V: 2555.63,2174.98 2545.02,2164.37 2543.86,2169.06 2550.94,2176.14
  region net U1TX: 2630.35,2343.85 2626.8,2329.28 2621.08,2335.38 2622.47,2341.07
  region net U1RX: 2627.5,2366.61 2642.5,2366.61 2637.5,2373.61 2632.5,2373.61
  region net VCC: 2830.63,2499.98 2820.02,2489.37 2816.84,2496.09 2823.91,2503.16
  region net VCC: 2839.98,2410.63 2829.37,2400.02 2836.09,2396.84 2843.16,2403.91
  region net CANH: 2925.63,2495.02 2915.02,2505.63 2913.61,2497.14 2917.14,2493.61
  region net CANL: 2918.39,2447.5 2918.39,2462.5 2911.39,2457.5 2911.39,2452.5
  region net +3.3V: 2516.28,2572.5 2516.28,2587.5 2523.28,2585 2523.28,2575
  region net +3.3V: 2597.5,2471.61 2612.5,2471.61 2610,2478.61 2600,2478.61
  region net +3.3V: 2614.98,2465.63 2604.37,2455.02 2611.09,2451.84 2618.16,2458.91
  region net W: 2416.98,1875.16 2403.68,1868.23 2402.45,1875.48 2411.75,1880.33
  region net V: 2388.41,1875.81 2377.81,1865.19 2374.62,1871.91 2381.69,1878.99
  region net U: 2311.62,1875.81 2301.04,1865.18 2297.84,1871.89 2304.9,1878.98
  region net KEY: 2221.61,2182.5 2221.61,2197.5 2228.61,2192.5 2228.61,2187.5
  region net KEY: 2298.39,2182.5 2298.39,2197.5 2291.39,2192.5 2291.39,2187.5
  region net RST: 2177.5,2313.39 2192.5,2313.39 2187.5,2306.39 2182.5,2306.39
  region net RST: 2106.95,2162.5 2106.95,2177.5 2113.95,2172.5 2113.95,2167.5
  region net +3.3V: 2451.63,2249.61 2451.6,2234.61 2458.61,2239.6 2458.62,2244.6
  region net +5V: 2620.06,2498.39 2635.06,2498.39 2632.56,2491.39 2622.56,2491.39
  region net +5V: 2708.39,2447.5 2708.39,2462.5 2701.39,2460 2701.39,2450
  region net U1RX: 2070.66,2716.89 2024.48,2722.39 2042.5,2698.39 2047.5,2697.79
  region net CANL: 2290.5,2846.75 2290.5,2893.25 2305,2872.5 2305,2867.5
  region net CANH: 2393.25,2849.5 2346.75,2849.5 2367.5,2827.8 2372.5,2827.8
  region net V: 1913.06,2374.06 1945.94,2406.94 1948.38,2378.69 1941.31,2371.62
  region net W: 1944.46,2514.65 1920.9,2474.57 1948.77,2479.16 1954,2488.07

## Silkscreen, mask and mechanical layers (free items; w line width, h text height)
Bottom Overlay:
  text "+" at 2573.86,2768.86 h31.5 r315
  text "L" at 2270,2764.25 h31.5
  text "H" at 2380,2764.25 h31.5
  text "G" at 2480,2764.25 h31.5
  text "G" at 2608.86,2748.86 h31.5 r315
  text "G" at 2206.14,2743.86 h31.5 r45
  text "R" at 2166.14,2703.86 h31.5 r45
  text "C" at 2668.86,2688.86 h31.5 r315
  text "T" at 2057.15,2595.97 h31.5 r27
  text "D" at 2768.86,2588.86 h31.5 r315
  text "+" at 2845,2529.25 h31.5
  text "W" at 1990,2474.25 h31.5
  text "V" at 1995.64,2370.3 h31.5 r21
  text "U" at 1990,2269.25 h31.5